# EAGLE board CNC_KONTROL_A4988 (EAGLE 7.5.0)
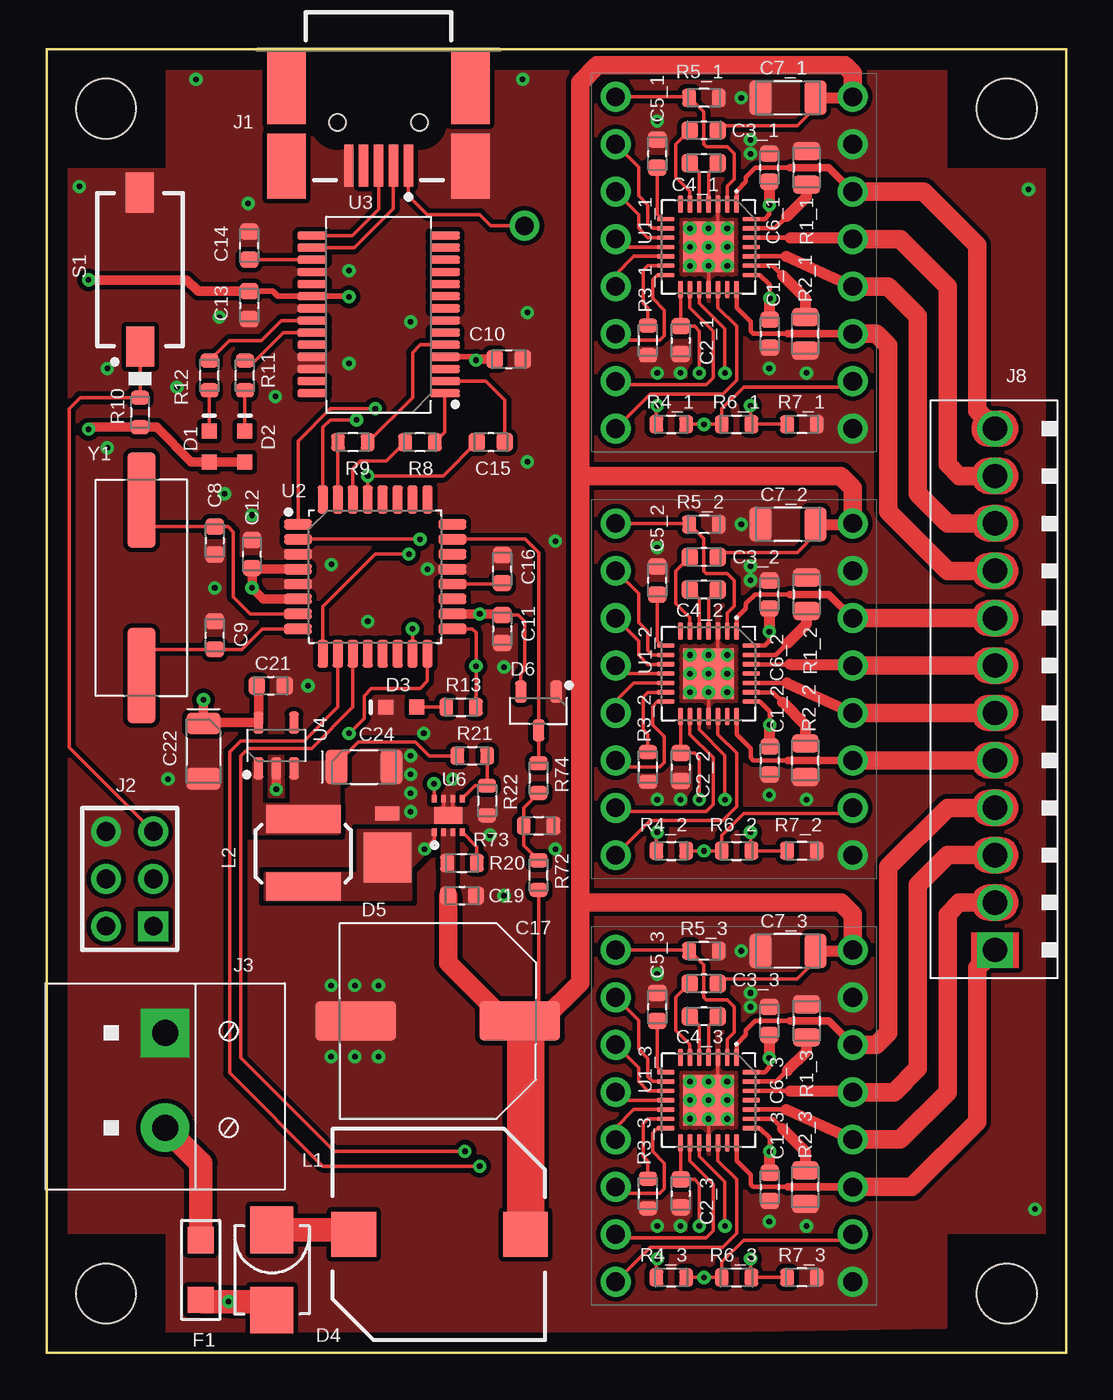
[diagram p0: board, top side]
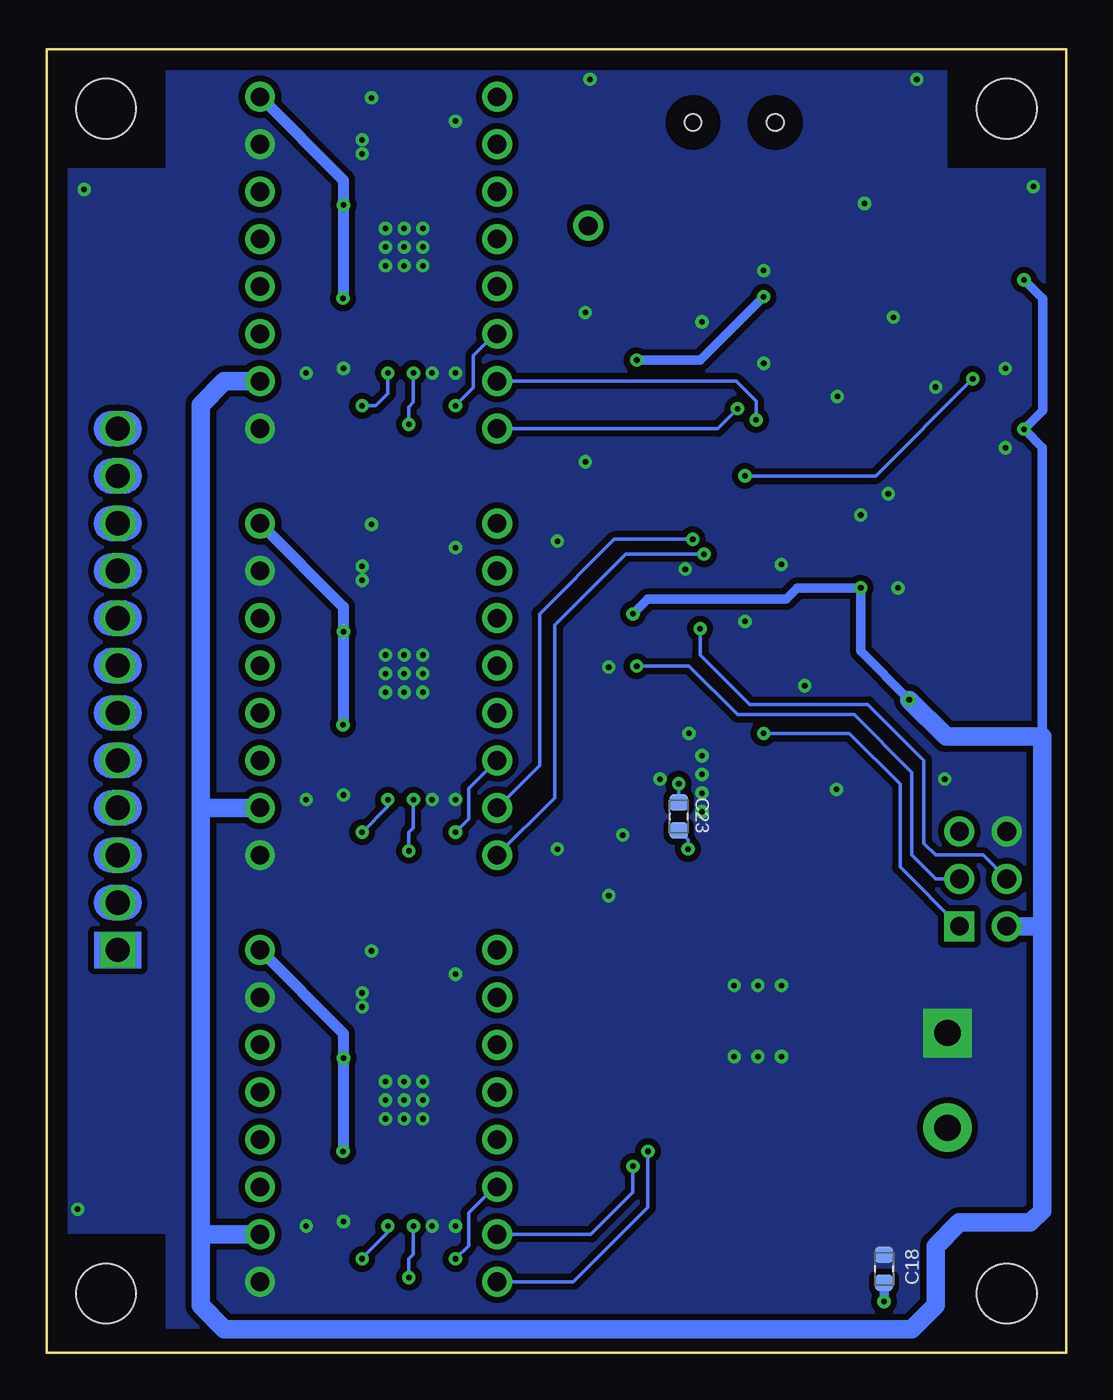
[diagram p1: board, bottom side, seen from below]

Size 54.61 x 69.85 mm. Coordinates in mm from the lower left corner, seen from the top.
Outline: 54.61,69.85 0,69.85 0,0 54.61,0 54.61,69.85
Copper layers (1*16): Top 0.035mm / dielectric 1.5mm / Bottom 0.035mm
Design rules "default *": minimum track width 10mil, minimum drill 0.61mm, track to track 8mil, track to pad 8mil, pad to pad 8mil, via to via 8mil, smd to smd 8mil, copper to edge 40mil, drill to drill 8mil, minimum pad ring 0mil, minimum via ring 8mil, stop-mask expansion 2mil, vias tented up to drill 12mil, thermal gap 10mil
Net classes: 0 Default: width 0.2 mm, clearance 0.2 mm
Holes 3.2 mm at 51.44,66.67 51.44,3.17 3.17,66.67 3.17,3.17

## Footprints (pad centres in the part's own frame; a part is rotated, then mirrored left to right if it is on the bottom)
CAP_1608_N = smd 0.87 x 0.97: 1 -0.75,0; 2 0.75,0
CAP_1608_N_C1_2 = smd 0.87 x 0.97: 1 -0.75,0; 2 0.75,0
CAP_1608_N_C11 = smd 0.87 x 0.97: 1 -0.75,0; 2 0.75,0
CAP_1608_N_C3_1 = smd 0.87 x 0.97: 1 -0.75,0; 2 0.75,0
CAP_1608_N_C4_1 = smd 0.87 x 0.97: 1 -0.75,0; 2 0.75,0
CAP_1608_N_C5_1 = smd 0.87 x 0.97: 1 -0.75,0; 2 0.75,0
CAP_1608_N_C6_2 = smd 0.87 x 0.97: 1 -0.75,0; 2 0.75,0
CAP_3216_N = smd 1.16 x 1.82: 1 -1.475,0; 2 1.475,0
CAP_1608_N_C9 = smd 0.87 x 0.97: 1 -0.75,0; 2 0.75,0
CAP_1608_N_C10 = smd 0.87 x 0.97: 1 -0.75,0; 2 0.75,0
CAP_1608_N_C12 = smd 0.87 x 0.97: 1 -0.75,0; 2 0.75,0
CAPAE1030X1050L350X90N = smd 4.31 x 2.12: 1 -4.4,0; 2 4.4,0
CAP_1608_N_C18 = smd 0.87 x 0.97: 1 -0.75,0; 2 0.75,0
CAP_1608_N_C19 = smd 0.87 x 0.97: 1 -0.75,0; 2 0.75,0
CAP_1608_N_C21 = smd 0.87 x 0.97: 1 -0.75,0; 2 0.75,0
CAPP_3216_N = smd 1.16 x 1.82: 1 -1.475,0; 2 1.475,0
CAPP_3216_N_C24 = smd 1.16 x 1.82: 1 -1.475,0; 2 1.475,0
KINGBRIGHT_APG1608CGKC_T = smd 0.8 x 0.8: 1 0.825,0; 2 -0.825,0
KINGBRIGHT_APG1608CGKC_T_D2 = smd 0.8 x 0.8: 1 0.825,0; 2 -0.825,0
SMB-DIODE-2K = smd 2.3 x 2.5: 1 0,2.15; 2 0,-2.15
MBRM130LT1G = smd 2.667 x 2.54: 1 -0.7,0 | smd 0.762 x 1.27: 2 1.652,0
SOT23-3P95_240X110L43X44N = smd 0.62 x 1.18: 1 -0.95,-1.035; 2 0.95,-1.035; 3 0,1.035
TP = drill 1 pad 1.6: 1 0,0
TP_DIR_2 = drill 1 pad 1.6: 1 0,0
TP_DIR_3 = drill 1 pad 1.6: 1 0,0
TP_EN_3 = drill 1 pad 1.6: 1 0,0
1206NW = smd 1.397 x 1.397: 1 0,1.6; 2 0,-1.6
TP_GND_1 = drill 1 pad 1.6: 1 0,0
MOLEX_0678038020 = smd 0.5 x 2.25: 1 -1.6,2.225; 2 -0.8,2.225; 3 0,2.225; 4 0.8,2.225; 5 1.6,2.225 | smd 2.05 x 3.5: 6 -4.925,2.25; 7 4.925,2.25 | smd 2.05 x 4: 8 -4.925,-2; 9 4.925,-2 | hole 0.9: -2.2,-0.1; 2.2,-0.1
ICSP = drill 1 pad 1.6 square: 1 -2.54,-1.27 | drill 1 pad 1.6: 2 -2.54,1.27; 3 0,-1.27; 4 0,1.27; 5 2.54,-1.27; 6 2.54,1.27
TE_TB-1X2_5.08_11X13_SC_A35 = drill 1.4 pad 2.6 square: 1 -2.54,0 | drill 1.4 pad 2.6: 2 2.54,0
OST_TB-1X12_2.54_31X7_SC_H = drill 1.3 pad 1.9 square: 1 -13.97,0 | drill 1.3 pad 1.9: 2 -11.43,0; 3 -8.89,0; 4 -6.35,0; 5 -3.81,0; 6 -1.27,0; 7 1.27,0; 8 3.81,0; 9 6.35,0; 10 8.89,0; 11 11.43,0; 12 13.97,0
SDR1105-220ML = smd 2.4 x 2.4: 1 0,4.5; 2 0,-4.7
SRN50408R2M = smd 1.5 x 4: 1 -1.8,0; 2 1.8,0
TP_MS1_3 = drill 1 pad 1.6: 1 0,0
TP_MS2_3 = drill 1 pad 1.6: 1 0,0
RES_2012_N = smd 0.98 x 1.42: 1 -0.895,0; 2 0.895,0
RES_1608_N_R3_1 = smd 0.75 x 0.97: 1 -0.795,0; 2 0.795,0
RES_1608_N = smd 0.75 x 0.97: 1 -0.795,0; 2 0.795,0
RES_1608_N_R5_1 = smd 0.75 x 0.97: 1 -0.795,0; 2 0.795,0
RES_1608_N_R10 = smd 0.75 x 0.97: 1 -0.795,0; 2 0.795,0
RES_1608_N_R12 = smd 0.75 x 0.97: 1 -0.795,0; 2 0.795,0
RES_1608_N_R20 = smd 0.75 x 0.97: 1 -0.795,0; 2 0.795,0
RES_1608_N_R21 = smd 0.75 x 0.97: 1 -0.795,0; 2 0.795,0
RES_1608_N_R22 = smd 0.75 x 0.97: 1 -0.795,0; 2 0.795,0
RES_1608_N_R72 = smd 0.75 x 0.97: 1 -0.795,0; 2 0.795,0
RES_1608_N_R73 = smd 0.75 x 0.97: 1 -0.795,0; 2 0.795,0
TP_RST_2 = drill 1 pad 1.6: 1 0,0
CK_BPA-01S = smd 2.15 x 1.5: 1 -4.13,0; 2 4.13,0
TP_SLEEP_1 = drill 1 pad 1.6: 1 0,0
TP_SLEEP_2 = drill 1 pad 1.6: 1 0,0
TP_SLEEP_3 = drill 1 pad 1.6: 1 0,0
TP_STEP_2 = drill 1 pad 1.6: 1 0,0
TP_STEP_3 = drill 1 pad 1.6: 1 0,0
QFN29P50_500X500X90L60X23T270N = smd 0.26 x 0.94: 1 -1.5,-2.29; 2 -1,-2.29; 3 -0.5,-2.29; 4 0,-2.29; 5 0.5,-2.29; 6 1,-2.29; 7 1.5,-2.29; 15 1.5,2.29; 16 1,2.29; 17 0.5,2.29; 18 0,2.29; 19 -0.5,2.29; 20 -1,2.29; 21 -1.5,2.29 | smd 0.94 x 0.26: 8 2.29,-1.5; 9 2.29,-1; 10 2.29,-0.5; 11 2.29,0; 12 2.29,0.5; 13 2.29,1; 14 2.29,1.5; 22 -2.29,1.5; 23 -2.29,1; 24 -2.29,0.5; 25 -2.29,0; 26 -2.29,-0.5; 27 -2.29,-1; 28 -2.29,-1.5 | smd 2.7 x 2.7: 29 0,0
QFN29P50_500X500X90L60X23T270N_U1_3 = smd 0.26 x 0.94: 1 -1.5,-2.29; 2 -1,-2.29; 3 -0.5,-2.29; 4 0,-2.29; 5 0.5,-2.29; 6 1,-2.29; 7 1.5,-2.29; 15 1.5,2.29; 16 1,2.29; 17 0.5,2.29; 18 0,2.29; 19 -0.5,2.29; 20 -1,2.29; 21 -1.5,2.29 | smd 0.94 x 0.26: 8 2.29,-1.5; 9 2.29,-1; 10 2.29,-0.5; 11 2.29,0; 12 2.29,0.5; 13 2.29,1; 14 2.29,1.5; 22 -2.29,1.5; 23 -2.29,1; 24 -2.29,0.5; 25 -2.29,0; 26 -2.29,-0.5; 27 -2.29,-1; 28 -2.29,-1.5 | smd 2.7 x 2.7: 29 0,0
QFP32P80_900X900X120L60X37N_AD2 = smd 0.57 x 1.5: 1 -2.8,-4.135; 2 -2,-4.135; 3 -1.2,-4.135; 4 -0.4,-4.135; 5 0.4,-4.135; 6 1.2,-4.135; 7 2,-4.135; 8 2.8,-4.135; 17 2.8,4.135; 18 2,4.135; 19 1.2,4.135; 20 0.4,4.135; 21 -0.4,4.135; 22 -1.2,4.135; 23 -2,4.135; 24 -2.8,4.135 | smd 1.5 x 0.57: 9 4.135,-2.8; 10 4.135,-2; 11 4.135,-1.2; 12 4.135,-0.4; 13 4.135,0.4; 14 4.135,1.2; 15 4.135,2; 16 4.135,2.8; 25 -4.135,2.8; 26 -4.135,2; 27 -4.135,1.2; 28 -4.135,0.4; 29 -4.135,-0.4; 30 -4.135,-1.2; 31 -4.135,-2; 32 -4.135,-2.8
SOP28P65_1020X780X200L75X30N_AD2 = smd 0.44 x 1.6: 1 -4.225,-3.555; 2 -3.575,-3.555; 3 -2.925,-3.555; 4 -2.275,-3.555; 5 -1.625,-3.555; 6 -0.975,-3.555; 7 -0.325,-3.555; 8 0.325,-3.555; 9 0.975,-3.555; 10 1.625,-3.555; 11 2.275,-3.555; 12 2.925,-3.555; 13 3.575,-3.555; 14 4.225,-3.555; 15 4.225,3.555; 16 3.575,3.555; 17 2.925,3.555; 18 2.275,3.555; 19 1.625,3.555; 20 0.975,3.555; 21 0.325,3.555; 22 -0.325,3.555; 23 -0.975,3.555; 24 -1.625,3.555; 25 -2.275,3.555; 26 -2.925,3.555; 27 -3.575,3.555; 28 -4.225,3.555
SOT23-5P95_275X110L40X32N = smd 0.52 x 1.17: 1 -0.95,-1.22; 2 0,-1.22; 3 0.95,-1.22; 4 0.95,1.22; 5 -0.95,1.22
AOZ1281 = smd 0.4 x 0.25: 1 -0.9,0.75; 2 -0.9,0.25; 3 -0.9,-0.25; 4 -0.9,-0.75; 5 0.9,-0.75; 6 0.9,-0.25; 7 0.9,0.25; 8 0.9,0.75 | smd 0.9 x 1.5: 9 0,0
TP_VUSB = drill 1 pad 1.6: 1 0,0
XTAL1140X490X430D1340L450X60N = smd 5.11 x 1.51: 1 -4.7,0; 2 4.7,0

## Placement (x,y rotation side)
C1_1  100n  [CAP_1608_N]  38.73,54.61 270 top
C1_2  100n  [CAP_1608_N_C1_2]  38.73,31.75 270 top
C1_3  100n  [CAP_1608_N_C1_2]  38.73,8.89 270 top
C2_1  0.22u  [CAP_1608_N_C11]  33.96,54.26 270 top
C2_2  0.22u  [CAP_1608_N_C11]  33.96,31.4 270 top
C2_3  0.22u  [CAP_1608_N_C11]  33.96,8.54 270 top
C3_1  100n  [CAP_1608_N_C3_1]  35.21,65.51 180 top
C3_2  100n  [CAP_1608_N_C3_1]  35.21,42.65 180 top
C3_3  100n  [CAP_1608_N_C3_1]  35.21,19.79 180 top
C4_1  100n  [CAP_1608_N_C4_1]  35.21,63.76 180 top
C4_2  100n  [CAP_1608_N_C11]  35.21,40.9 180 top
C4_3  100n  [CAP_1608_N_C11]  35.21,18.04 180 top
C5_1  0.22u  [CAP_1608_N_C5_1]  32.71,64.26 90 top
C5_2  0.22u  [CAP_1608_N_C5_1]  32.71,41.4 90 top
C5_3  0.22u  [CAP_1608_N_C5_1]  32.71,18.54 90 top
C6_1  100n  [CAP_1608_N_C3_1]  38.71,63.51 90 top
C6_2  100n  [CAP_1608_N_C6_2]  38.71,40.65 90 top
C6_3  100n  [CAP_1608_N_C6_2]  38.71,17.79 90 top
C7_1  4.7u  [CAP_3216_N]  39.71,67.26 180 top
C7_2  4.7u  [CAP_3216_N]  39.71,44.4 180 top
C7_3  4.7u  [CAP_3216_N]  39.71,21.54 180 top
C8  16p  [CAP_1608_N]  9.01,43.53 270 top
C9  16p  [CAP_1608_N_C9]  9.01,38.45 90 top
C10  100n  [CAP_1608_N_C10]  24.75,53.25 0 top
C11  100n  [CAP_1608_N_C11]  24.4,38.8 270 top
C12  100n  [CAP_1608_N_C12]  11,42.8 90 top
C13  100n  [CAP_1608_N_C9]  10.85,56.14 270 top
C14  100n  [CAP_1608_N_C11]  10.85,59.34 90 top
C15  100n  [CAP_1608_N_C11]  23.8,48.8 180 top
C16  100n  [CAP_1608_N_C9]  24.4,42 90 top
C17  220 uF 35V  [CAPAE1030X1050L350X90N]  20.95,17.78 180 top
C18  0.1uF  [CAP_1608_N_C18]  9.75,4.5 90 bottom
C19  0.1uF  [CAP_1608_N_C19]  22.25,24.5 0 top
C21  0.1uF  [CAP_1608_N_C21]  12,35.75 0 top
C22  22uF  [CAPP_3216_N]  8.4,32.25 270 top
C23  10nF  [CAP_1608_N_C18]  20.75,28.75 90 bottom
C24  22uF  [CAPP_3216_N_C24]  17,31.4 0 top
D1  APG1608CGKC/T  [KINGBRIGHT_APG1608CGKC_T]  8.72,48.57 270 top
D2  APG1608CGKC/T  [KINGBRIGHT_APG1608CGKC_T_D2]  10.62,48.57 270 top
D3  APG1608CGKC/T  [KINGBRIGHT_APG1608CGKC_T_D2]  19,34.6 0 top
D4  S3AB-13_SMB  [SMB-DIODE-2K]  12.06,4.45 0 top
D5  MBRM130LT1G  [MBRM130LT1G]  18.25,27.25 90 top
D6  BAT54ALT1G  [SOT23-3P95_240X110L43X44N]  26.35,34.4 180 top
DIR_1  DIR  [TP]  30.48,49.53 90 top
DIR_2  DIR  [TP_DIR_2]  30.48,26.67 90 top
DIR_3  DIR  [TP_DIR_3]  30.48,3.81 90 top
EN_1  EN  [TP]  30.48,67.31 90 top
EN_2  EN  [TP]  30.48,44.45 90 top
EN_3  EN  [TP_EN_3]  30.48,21.59 90 top
F1  C1S5  [1206NW]  8.26,4.45 0 top
GND_1  GND  [TP_GND_1]  43.18,64.77 90 top
GND_2  GND  [TP_GND_1]  43.18,41.91 90 top
GND_3  GND  [TP_GND_1]  43.18,19.05 90 top
J1  0678038020  [MOLEX_0678038020]  17.78,65.84 180 top
J2  ICSP  [ICSP]  4.45,25.4 90 top
J3  1546074-2  [TE_TB-1X2_5.08_11X13_SC_A35]  6.35,14.61 270 top
J8  OSTVN12A150  [OST_TB-1X12_2.54_31X7_SC_H]  50.8,35.56 90 top
L1  22uH  [SDR1105-220ML]  20.95,6.35 90 top
L2  8.2uH  [SRN50408R2M]  13.75,26.8 90 top
MS1_1  MS1  [TP]  30.48,64.77 90 top
MS1_2  MS1  [TP]  30.48,41.91 90 top
MS1_3  MS1  [TP_MS1_3]  30.48,19.05 90 top
MS2_1  MS2  [TP]  30.48,62.23 90 top
MS2_2  MS2  [TP]  30.48,39.37 90 top
MS2_3  MS2  [TP_MS2_3]  30.48,16.51 90 top
MS3_1  MS3  [TP]  30.48,59.69 90 top
MS3_2  MS3  [TP]  30.48,36.83 90 top
MS3_3  MS3  [TP]  30.48,13.97 90 top
OUT1A_1  1A  [TP_GND_1]  43.18,57.15 90 top
OUT1A_2  1A  [TP_GND_1]  43.18,34.29 90 top
OUT1A_3  1A  [TP_GND_1]  43.18,11.43 90 top
OUT1B_1  1B  [TP_GND_1]  43.18,54.61 90 top
OUT1B_2  1B  [TP_GND_1]  43.18,31.75 90 top
OUT1B_3  1B  [TP_GND_1]  43.18,8.89 90 top
OUT2A_1  2A  [TP_GND_1]  43.18,59.69 90 top
OUT2A_2  2A  [TP_GND_1]  43.18,36.83 90 top
OUT2A_3  2A  [TP_GND_1]  43.18,13.97 90 top
OUT2B_1  2B  [TP_GND_1]  43.18,62.23 90 top
OUT2B_2  2B  [TP_GND_1]  43.18,39.37 90 top
OUT2B_3  2B  [TP_GND_1]  43.18,16.51 90 top
R1_1  0.05  [RES_2012_N]  40.71,63.51 270 top
R1_2  0.05  [RES_2012_N]  40.71,40.65 270 top
R1_3  0.05  [RES_2012_N]  40.71,17.79 270 top
R2_1  0.05  [RES_2012_N]  40.64,54.61 90 top
R2_2  0.05  [RES_2012_N]  40.64,31.75 90 top
R2_3  0.05  [RES_2012_N]  40.64,8.89 90 top
R3_1  10K  [RES_1608_N_R3_1]  32.21,54.26 270 top
R3_2  10K  [RES_1608_N_R3_1]  32.21,31.4 270 top
R3_3  10K  [RES_1608_N_R3_1]  32.21,8.54 270 top
R4_1  100K  [RES_1608_N]  33.46,49.76 0 top
R4_2  100K  [RES_1608_N]  33.46,26.9 0 top
R4_3  100K  [RES_1608_N]  33.46,4.04 0 top
R5_1  100K  [RES_1608_N_R5_1]  35.21,67.26 180 top
R5_2  100K  [RES_1608_N_R10]  35.21,44.4 180 top
R5_3  100K  [RES_1608_N_R10]  35.21,21.54 180 top
R6_1  20K  [RES_1608_N]  36.96,49.76 0 top
R6_2  20K  [RES_1608_N]  36.96,26.9 0 top
R6_3  20K  [RES_1608_N]  36.96,4.04 0 top
R7_1  *  [RES_1608_N_R10]  40.46,49.76 180 top
R7_2  *  [RES_1608_N_R10]  40.46,26.9 180 top
R7_3  *  [RES_1608_N_R10]  40.46,4.04 180 top
R8  1K  [RES_1608_N]  20,48.8 180 top
R9  1K  [RES_1608_N]  16.4,48.8 180 top
R10  10K  [RES_1608_N_R10]  5,50.4 270 top
R11  1K  [RES_1608_N_R10]  10.62,52.38 90 top
R12  1K  [RES_1608_N_R12]  8.71,52.38 90 top
R13  1K  [RES_1608_N]  22.2,34.6 0 top
R20  10k  [RES_1608_N_R20]  22.25,26.25 0 top
R21  73.2k 1%  [RES_1608_N_R21]  22.8,32 0 top
R22  7.15k 1%  [RES_1608_N_R22]  23.6,29.6 270 top
R72  330k 1%  [RES_1608_N_R72]  26.35,25.6 90 top
R73  20.0k 1%  [RES_1608_N_R73]  26.35,28.25 0 top
R74  100  [RES_1608_N_R21]  26.35,30.8 270 top
RST_1  RST  [TP]  30.48,57.15 90 top
RST_2  RST  [TP_RST_2]  30.48,34.29 90 top
RST_3  RST  [TP]  30.48,11.43 90 top
S1  BPA01SB  [CK_BPA-01S]  5,58.05 90 top
SLEEP_1  SLEEP  [TP_SLEEP_1]  30.48,54.61 90 top
SLEEP_2  SLEEP  [TP_SLEEP_2]  30.48,31.75 90 top
SLEEP_3  SLEEP  [TP_SLEEP_3]  30.48,8.89 90 top
STEP_1  STEP  [TP]  30.48,52.07 90 top
STEP_2  STEP  [TP_STEP_2]  30.48,29.21 90 top
STEP_3  STEP  [TP_STEP_3]  30.48,6.35 90 top
TP_1  GND  [TP_GND_1]  43.18,49.53 90 top
TP_2  GND  [TP_GND_1]  43.18,26.67 90 top
TP_3  GND  [TP_GND_1]  43.18,3.81 90 top
U1_1  A4988  [QFN29P50_500X500X90L60X23T270N]  35.46,59.26 180 top
U1_2  A4988  [QFN29P50_500X500X90L60X23T270N]  35.46,36.4 180 top
U1_3  A4988  [QFN29P50_500X500X90L60X23T270N_U1_3]  35.46,13.54 180 top
U2  ATMEGA328P-AU  [QFP32P80_900X900X120L60X37N_AD2]  17.6,41.6 270 top
U3  FT232RL-TUBE  [SOP28P65_1020X780X200L75X30N_AD2]  17.78,55.65 90 top
U4  TPS76350DBV  [SOT23-5P95_275X110L40X32N]  12.3,32.55 0 top
U6  AOZ1281  [AOZ1281]  21.52,28.8 90 top
VDD_1  VDD  [TP_GND_1]  43.18,52.07 90 top
VDD_2  VDD  [TP_GND_1]  43.18,29.21 90 top
VDD_3  VDD  [TP_GND_1]  43.18,6.35 90 top
VMT_1  VMT  [TP_GND_1]  43.18,67.31 90 top
VMT_2  VMT  [TP_GND_1]  43.18,44.45 90 top
VMT_3  VMT  [TP_GND_1]  43.18,21.59 90 top
VUSB  TP  [TP_VUSB]  25.6,60.4 90 top
Y1  HC49/4HSMX  [XTAL1140X490X430D1340L450X60N]  5.08,40.99 90 top

## Library data of the parts
C1_1 = common; HIERARCHY: Block1 C1; UNIQUE_NAME: CAP_1608_METRIC
C1_2 = common; HIERARCHY: Block2 C1; UNIQUE_NAME: CAP_1608_METRIC
C1_3 = common; HIERARCHY: Block3 C1; UNIQUE_NAME: CAP_1608_METRIC
C2_1 = common; HIERARCHY: Block1 C2; UNIQUE_NAME: CAP_1608_METRIC
C2_2 = common; HIERARCHY: Block2 C2; UNIQUE_NAME: CAP_1608_METRIC
C2_3 = common; HIERARCHY: Block3 C2; UNIQUE_NAME: CAP_1608_METRIC
C3_1 = common; HIERARCHY: Block1 C3; UNIQUE_NAME: CAP_1608_METRIC
C3_2 = common; HIERARCHY: Block2 C3; UNIQUE_NAME: CAP_1608_METRIC
C3_3 = common; HIERARCHY: Block3 C3; UNIQUE_NAME: CAP_1608_METRIC
C4_1 = common; HIERARCHY: Block1 C4; UNIQUE_NAME: CAP_1608_METRIC
C4_2 = common; HIERARCHY: Block2 C4; UNIQUE_NAME: CAP_1608_METRIC
C4_3 = common; HIERARCHY: Block3 C4; UNIQUE_NAME: CAP_1608_METRIC
C5_1 = common; HIERARCHY: Block1 C5; UNIQUE_NAME: CAP_1608_METRIC
C5_2 = common; HIERARCHY: Block2 C5; UNIQUE_NAME: CAP_1608_METRIC
C5_3 = common; HIERARCHY: Block3 C5; UNIQUE_NAME: CAP_1608_METRIC
C6_1 = common; HIERARCHY: Block1 C6; UNIQUE_NAME: CAP_1608_METRIC
C6_2 = common; HIERARCHY: Block2 C6; UNIQUE_NAME: CAP_1608_METRIC
C6_3 = common; HIERARCHY: Block3 C6; UNIQUE_NAME: CAP_1608_METRIC
C7_1 = common; HIERARCHY: Block1 C7; UNIQUE_NAME: CAP_3216_METRIC
C7_2 = common; HIERARCHY: Block2 C7; UNIQUE_NAME: CAP_3216_METRIC
C7_3 = common; HIERARCHY: Block3 C7; UNIQUE_NAME: CAP_3216_METRIC
C8-C16 = common; UNIQUE_NAME: CAP_1608_METRIC
C17 = common; DATASHEET: http://datasheets.diptrace.com/cap/afc.pdf; MANUFACTURER: Cornell Dubilier Electronics; PART_NUMBER_(DIGI-KEY): AFC227M35G24B-F-ND; UNIQUE_NAME: CDE_AFC,SIZE_G_CAPP
C18 C19 C21-C24 DIR_1-DIR_3 EN_1-EN_3 F1 GND_1-GND_3 J2 L1 L2 MS1_1-MS1_3 MS2_1-MS2_3 MS3_1-MS3_3 OUT1A_1-OUT1A_3 OUT1B_1-OUT1B_3 OUT2A_1-OUT2A_3 OUT2B_1-OUT2B_3 R20-R22 R72-R74 RST_1-RST_3 SLEEP_1-SLEEP_3 STEP_1-STEP_3 TP_1-TP_3 U6 VDD_1-VDD_3 VMT_1-VMT_3 VUSB = common
D1-D3 = common; DATASHEET: http://datasheets.diptrace.com/sensors_led/APG1608CGKC-T.pdf; MANUFACTURER: Kingbright; PART_NUMBER_(DIGI-KEY): 754-1357-6-ND; UNIQUE_NAME: KINGBRIGHT_APG1608CGKC_T
D4 = common; DATASHEET: https://www.diodes.com/assets/Datasheets/ds16005.pdf; STYLE: SMD; TYPE: Schottky
D5 = common; DATASHEET: https://www.onsemi.com/pub/Collateral/MBRM130L-D.PDF; STYLE: SMD; TYPE: Schottky
D6 = common; MANUFACTURER: ON Semiconductor; STYLE: SMT; TYPE: Diode
J1 = common; DATASHEET: http://datasheets.diptrace.com/con_usb/678038020_sd.pdf; MANUFACTURER: Molex; PART_NUMBER_(DIGI-KEY): WM17148DKR-ND; UNIQUE_NAME: MOLEX_0678038020
J3 = common; DATASHEET: http://datasheets.diptrace.com/con_terminal_blocks/1546074.pdf; MANUFACTURER: TE Connectivity; PART_NUMBER_(DIGI-KEY): 1546074-2-ND; UNIQUE_NAME: TE_TB-1X2_5.08_11X13_SC_A35
J8 = common; DATASHEET: http://datasheets.diptrace.com/con_terminal_blocks/ostvnxxa150.pdf; MANUFACTURER: On Shore Technology; PART_NUMBER_(DIGI-KEY): ED10568-ND; UNIQUE_NAME: OST_TB-1X12_2.54_31X7_SC_H
R1_1 = common; HIERARCHY: Block1 R1; UNIQUE_NAME: RES_2012_METRIC
R1_2 = common; HIERARCHY: Block2 R1; UNIQUE_NAME: RES_2012_METRIC
R1_3 = common; HIERARCHY: Block3 R1; UNIQUE_NAME: RES_2012_METRIC
R2_1 = common; HIERARCHY: Block1 R2; UNIQUE_NAME: RES_2012_METRIC
R2_2 = common; HIERARCHY: Block2 R2; UNIQUE_NAME: RES_2012_METRIC
R2_3 = common; HIERARCHY: Block3 R2; UNIQUE_NAME: RES_2012_METRIC
R3_1 = common; HIERARCHY: Block1 R3; UNIQUE_NAME: RES_1608_METRIC
R3_2 = common; HIERARCHY: Block2 R3; UNIQUE_NAME: RES_1608_METRIC
R3_3 = common; HIERARCHY: Block3 R3; UNIQUE_NAME: RES_1608_METRIC
R4_1 = common; HIERARCHY: Block1 R4; UNIQUE_NAME: RES_1608_METRIC
R4_2 = common; HIERARCHY: Block2 R4; UNIQUE_NAME: RES_1608_METRIC
R4_3 = common; HIERARCHY: Block3 R4; UNIQUE_NAME: RES_1608_METRIC
R5_1 = common; HIERARCHY: Block1 R5; UNIQUE_NAME: RES_1608_METRIC
R5_2 = common; HIERARCHY: Block2 R5; UNIQUE_NAME: RES_1608_METRIC
R5_3 = common; HIERARCHY: Block3 R5; UNIQUE_NAME: RES_1608_METRIC
R6_1 = common; HIERARCHY: Block1 R6; UNIQUE_NAME: RES_1608_METRIC
R6_2 = common; HIERARCHY: Block2 R6; UNIQUE_NAME: RES_1608_METRIC
R6_3 = common; HIERARCHY: Block3 R6; UNIQUE_NAME: RES_1608_METRIC
R7_1 = common; HIERARCHY: Block1 R7; UNIQUE_NAME: RES_1608_METRIC
R7_2 = common; HIERARCHY: Block2 R7; UNIQUE_NAME: RES_1608_METRIC
R7_3 = common; HIERARCHY: Block3 R7; UNIQUE_NAME: RES_1608_METRIC
R8-R13 = common; UNIQUE_NAME: RES_1608_METRIC
S1 = common; DATASHEET: http://datasheets.diptrace.com/switches/BPA_series.pdf; MANUFACTURER: C&K; PART_NUMBER_(DIGI-KEY): BPA01SB-ND; UNIQUE_NAME: CK_BPA-01S
U1_1 = common; HIERARCHY: Block1 U1; MANUFACTURER: Silicon Labs
U1_2 = common; HIERARCHY: Block2 U1; MANUFACTURER: Silicon Labs
U1_3 = common; HIERARCHY: Block3 U1; MANUFACTURER: Silicon Labs
U2 = common; DATASHEET: http://datasheets.diptrace.com/microchip/atmel-8271-8-bit-avr-microcontroller-atmega48a-48pa-88a-88pa-168a-168pa-328-328p_datasheet_summary.pdf; MANUFACTURER: Atmel; PART_NUMBER_(DIGI-KEY): ATMEGA328P-AU-ND; UNIQUE_NAME: ATMEL_32A
U3 = common; DATASHEET: http://datasheets.diptrace.com/misc/FT232R.pdf; MANUFACTURER: FTDI Chip; PART_NUMBER_(DIGI-KEY): 768-1306-ND; UNIQUE_NAME: FTDI_SSOP-28
U4 = common; MANUFACTURER: NXP Semiconductors
Y1 = common; DATASHEET: http://datasheets.diptrace.com/crystals/hc49-4hsmx.pdf; MANUFACTURER: CN Electronics; UNIQUE_NAME: IQD_HC49_4H

## Nets
9V: C24.1 L2.2 R21.1 U4.1 U4.3
GND: C1_1.2 C1_2.2 C1_3.2 C2_1.2 C2_2.2 C2_3.2 C5_1.2 C5_2.2 C5_3.2 C6_1.2 C6_2.2 C6_3.2 C7_1.2 C7_2.2 C7_3.2 C8.2 C9.2 C10.2 C11.2 C12.2 C13.2 C14.2 C16.2 C17.2 C18.2 C19.2 C21.2 C22.2 C24.2 D3.2 D5.2 D6.1 GND_1.1 GND_2.1 GND_3.1 J1.5 J1.6 J2.6 J3.1 R1_1.1 R1_2.1 R1_3.1 R2_1.1 R2_2.1 R2_3.1 R3_1.2 R3_2.2 R3_3.2 R5_1.1 R5_2.1 R5_3.1 R7_1.1 R7_2.1 R7_3.1 R22.2 R73.2 S1.2 TP_1.1 TP_2.1 TP_3.1 U1_1.3 U1_1.18 U1_1.29 U1_2.3 U1_2.18 U1_2.29 U1_3.3 U1_3.18 U1_3.29 U2.3 U2.5 U2.21 U3.7 U3.18 U3.21 U3.25 U3.26 U4.2 U6.6 U6.7 U6.9
Net_0_1: R1_1.2 U1_1.27
Net_0_2: R1_2.2 U1_2.27
Net_0_3: R1_3.2 U1_3.27
Net_1: D3.1 R13.1
Net_2_1: R2_1.2 U1_1.23
Net_2_2: R2_2.2 U1_2.23
Net_2_3: R2_3.2 U1_3.23
Net_7: D6.3 R74.1 U2.23
Net_8: C2_1.1 C2_2.1 C2_3.1 C10.1 C11.1 C12.1 C13.1 C21.1 C22.1 D1.1 D2.1 D6.2 J2.2 R4_1.2 R4_2.2 R4_3.2 R6_1.1 R6_2.1 R6_3.1 R10.2 U1_1.15 U1_2.15 U1_3.15 U2.4 U2.6 U2.18 U3.4 U3.20 U4.5 VDD_1.1 VDD_2.1 VDD_3.1
Net_11_1: C3_1.2 U1_1.6
Net_11_2: C3_2.2 U1_2.6
Net_11_3: C3_3.2 U1_3.6
Net_12_1: C4_1.1 U1_1.4
Net_12_2: C4_2.1 U1_2.4
Net_12_3: C4_3.1 U1_3.4
Net_13_1: C4_1.2 U1_1.5
Net_13_2: C4_2.2 U1_2.5
Net_13_3: C4_3.2 U1_3.5
Net_14_1: C5_1.1 U1_1.8
Net_14_2: C5_2.1 U1_2.8
Net_14_3: C5_3.1 U1_3.8
Net_15_1: R3_1.1 U1_1.13
Net_15_2: R3_2.1 U1_2.13
Net_15_3: R3_3.1 U1_3.13
Net_16_1: R4_1.1 SLEEP_1.1 U1_1.14
Net_16_2: R4_2.1 SLEEP_2.1 U1_2.14
Net_16_3: R4_3.1 SLEEP_3.1 U1_3.14
Net_17_1: MS1_1.1 U1_1.9
Net_17_2: MS1_2.1 U1_2.9
Net_17_3: MS1_3.1 U1_3.9
Net_18_1: MS2_1.1 U1_1.10
Net_18_2: MS2_2.1 U1_2.10
Net_18_3: MS2_3.1 U1_3.10
Net_19_1: MS3_1.1 U1_1.11
Net_19_2: MS3_2.1 U1_2.11
Net_19_3: MS3_3.1 U1_3.11
Net_20_1: EN_1.1 R5_1.2 U1_1.2
Net_20_2: EN_2.1 R5_2.2 U1_2.2
Net_20_3: EN_3.1 R5_3.2 U1_3.2
Net_21_1: RST_1.1 U1_1.12
Net_21_2: RST_2.1 U1_2.12
Net_21_3: RST_3.1 U1_3.12
Net_22_1: R6_1.2 R7_1.2 U1_1.17
Net_22_2: R6_2.2 R7_2.2 U1_2.17
Net_22_3: R6_3.2 R7_3.2 U1_3.17
Net_23: J1.3 U3.15
Net_24: J1.2 U3.16
Net_25: R8.1 U3.1
Net_26: R9.1 U3.5
Net_27: R8.2 U2.30
Net_28: R9.2 U2.31
Net_29: C9.1 U2.8 Y1.1
Net_30: C8.1 U2.7 Y1.2
Net_31: J2.4 U2.15
Net_32: J2.1 U2.16
Net_33: J2.3 R13.2 U2.17
Net_34: C15.2 J2.5 R10.1 S1.1 U2.29
Net_35: J1.1 VUSB.1
Net_36: C14.1 U3.17
Net_37: C15.1 U3.2
Net_38: C16.1 U2.20
Net_39: J8.10 OUT1A_1.1 U1_1.24
Net_40: J8.9 OUT1B_1.1 U1_1.21
Net_41: J8.11 OUT2A_1.1 U1_1.26
Net_42: J8.12 OUT2B_1.1 U1_1.1
Net_43: J8.6 OUT1A_2.1 U1_2.24
Net_44: J8.5 OUT1B_2.1 U1_2.21
Net_45: J8.7 OUT2A_2.1 U1_2.26
Net_46: J8.8 OUT2B_2.1 U1_2.1
Net_47: J8.2 OUT1A_3.1 U1_3.24
Net_48: J8.1 OUT1B_3.1 U1_3.21
Net_49: J8.3 OUT2A_3.1 U1_3.26
Net_50: J8.4 OUT2B_3.1 U1_3.1
Net_51: STEP_1.1 U1_1.16 U2.32
Net_52: DIR_1.1 U1_1.19 U2.1
Net_53: STEP_2.1 U1_2.16 U2.2
Net_54: DIR_2.1 U1_2.19 U2.9
Net_55: STEP_3.1 U1_3.16 U2.10
Net_56: DIR_3.1 U1_3.19 U2.11
Net_57: R11.2 U3.23
Net_58: R12.2 U3.22
Net_59: D1.2 R12.1
Net_60: D2.2 R11.1
Net_62: C18.1 D4.2 F1.2
Net_63: D4.1 L1.1
Net_94: F1.1 J3.2
Net_97: R72.2 R73.1 R74.2
Net_99: R20.2 U6.4
Net_100: C23.1 D5.1 L2.1 U6.1
Net_101: C23.2 U6.8
Net_103: R21.2 R22.1 U6.5
VMOT: C1_1.1 C1_2.1 C1_3.1 C3_1.1 C3_2.1 C3_3.1 C6_1.1 C6_2.1 C6_3.1 C7_1.1 C7_2.1 C7_3.1 C17.1 C19.1 L1.2 R20.1 R72.1 U1_1.22 U1_1.28 U1_2.22 U1_2.28 U1_3.22 U1_3.28 U6.2 U6.3 VMT_1.1 VMT_2.1 VMT_3.1

## Tracks (layer width: path | path; a pad name or v marks a point on that pad's centre or on a via)
9V
  Top 0.2: R21.1 20.5,32 19.75,32.75 16.7,32.75 15.35,31.4 C24.1
  pour Top (isolate 0.2, no thermals): 15.62,27.88 11.12,27.88 11.12,31.62 11.47,31.62 11.47,29.38 13.12,29.38 13.12,31.62 15.62,31.62
GND  (via drill 0.3 pad 0.6)
  Top 0.2: U1_1.18 v35.46,58.26 | U1_1.3 35.96,59.76 U1_1.29 | U1_2.18 v35.46,35.4 | U1_2.3 35.96,36.9 U1_2.29 | U1_3.18 v35.46,12.54 | U1_3.3 35.96,14.04 U1_3.29 | U6.6 21.77,29.05 U6.9 21.27,29.05 U6.7
  Top 0.5: U4.2 v12.3,30.2
  other vias: 36.46,60.26 35.46,60.26 34.46,60.26 34.46,59.26 35.46,59.26 36.46,59.26 36.46,58.26 34.46,58.26 37.21,67.26 32.71,66.01 37.71,65.01 40.71,52.51 38.71,52.76 33.96,52.51 32.71,52.51 37.71,64.26 36.46,37.4 35.46,37.4 34.46,37.4 34.46,36.4 35.46,36.4 36.46,36.4 36.46,35.4 34.46,35.4 37.21,44.4 32.71,43.15 37.71,42.15 40.71,29.65 38.71,29.9 33.96,29.65 32.71,29.65 37.71,41.4 36.46,14.54 35.46,14.54 34.46,14.54 34.46,13.54 35.46,13.54 36.46,13.54 36.46,12.54 34.46,12.54 37.21,21.54 32.71,20.29 37.71,19.29 40.71,6.79 38.71,7.04 33.96,6.79 32.71,6.79 37.71,18.54 9.01,40.99 17.78,15.88 16.51,15.88 15.24,15.88 15.24,19.68 16.51,19.68 17.78,19.68 20.2,33.2 19.5,55.25 16.2,58 3.25,52.75 1.75,62.5 10.79,61.59 16.19,53.02 12.25,51.25 6.99,51.75 9.53,46.04 3.25,48.5 11,44.9 20.4,42 19.5,31 19.5,30 19.5,29 19.5,32 21.75,30.75 27.25,43.5 6.5,30.75 14,35.75 15.25,42.25 27.25,27 24.5,36.75 25.75,47.75 25.75,55.75 8,68.25 23.75,27.75 25.5,68.25 9.25,55.5 24.5,24.5 17.2,39.2 52.6,62.35 52.95,7.7
  pour Bottom (isolate 0.33, rank 2): 6.48,69.09 6.48,63.37 0.76,63.37 0.76,6.48 6.48,6.48 6.48,0.76 48.13,1.4 48.13,6.48 53.85,6.48 53.85,63.37 48.13,63.37 48.13,69.09
  pour Top (isolate 0.25, rank 2): 6.48,69.09 6.48,63.37 0.76,63.37 0.76,6.48 6.48,6.48 6.48,0.76 48.13,1.4 48.13,6.48 53.85,6.48 53.85,63.37 48.13,63.37 48.13,69.09
Net_0_1
  Top 0.25: U1_1.27 39.01,60.26 39.65,60.9
  Top 0.6: 39.65,60.9 40.71,61.96 R1_1.2
Net_0_2
  Top 0.25: U1_2.27 39.05,37.4 39.66,38.02
  Top 0.6: 39.66,38.02 40.71,39.06 R1_2.2
Net_0_3
  Top 0.25: U1_3.27 39.09,14.54 39.69,15.13
  Top 0.6: 39.69,15.13 40.71,16.16 R1_3.2
Net_1
  Top 0.2: D3.1 R13.1 | R13.1
Net_2_1
  Top 0.25: U1_1.23 38.9,58.26 39.42,57.73
  Top 0.6: 39.42,57.73 40.64,56.52 R2_1.2
Net_2_2
  Top 0.25: U1_2.23 38.9,35.4 39.42,34.88
  Top 0.6: 39.42,34.88 40.64,33.66 R2_2.2
Net_2_3
  Top 0.25: U1_3.23 38.9,12.54 39.42,12.02
  Top 0.6: 39.42,12.02 40.64,10.79 R2_3.2
Net_7
  Top 0.2: U2.23 25.65,43.6 26.35,42.9 D6.3 R74.1 | R74.1
Net_8  (via drill 0.3 pad 0.6)
  Top 0.2: U1_1.15 C2_1.1 34.71,55.01 34.96,54.76 v34.96,52.51 | R4_1.2 v35.21,49.76 | v35.21,49.76 | v35.21,49.76 R6_1.1 36.16,50.59 37.34,51.76 42.87,51.76 VDD_1.1 | v35.21,49.76 | U1_2.15 C2_2.1 34.71,32.15 34.96,31.9 v34.96,29.65 | R4_2.2 v35.21,26.9 | v35.21,26.9 | v35.21,26.9 R6_2.1 36.16,27.73 37.34,28.9 42.87,28.9 VDD_2.1 | v35.21,26.9 | U1_3.15 C2_3.1 34.71,9.29 34.96,9.04 v34.96,6.79 | R4_3.2 v35.21,4.04 | v35.21,4.04 | v35.21,4.04 R6_3.1 36.16,4.87 37.34,6.04 42.87,6.04 VDD_3.1 | v35.21,4.04 | D6.2 25.4,36.4 25.6,36.6 25.6,39.2 25.25,39.55 C11.1
  Top 0.3: C13.1 12.11,56.89 12.38,56.62 U3.20 16.18,56.62 v16.2,56.6 | U3.4 22.82,53.38 v23,53.2
  Top 0.5: v2.25,49.5 2.35,49.6 R10.2 5.89,49.6 7.75,47.74 D1.1 D2.1 | D2.1 | v2.25,57.5 7.5,57.5 8.11,56.89 C13.1 | C21.1 11.35,35.65 U4.5 8.45,33.77 C22.1 v8.4,35 | v8.4,35 | U2.18 v23.2,39.6 | v23.2,39.6 | v23.2,39.6 24.35,39.6 C11.1 | U2.4 11.05,42 C12.1 v11,41 11.6,40.4 U2.6 | C10.1 23.05,53.25 v23,53.2
  Bottom 0.2: v35.21,49.76 35.21,50.69 34.96,50.94 v34.96,52.51 | v35.21,26.9 35.21,27.89 34.96,28.14 v34.96,29.65 | v35.21,4.04 35.21,5.04 34.96,5.29 v34.96,6.79
  Bottom 0.5: v8.4,35 11,37.6 v11,41 14.4,41 15,40.4 22.4,40.4 v23.2,39.6 | 1.27,33.02 1.27,48.52 v2.25,49.5 1.25,50.5 1.25,56.5 v2.25,57.5 | v23,53.2 19.6,53.2 v16.2,56.6
  Bottom 1: VDD_1.1 45.09,52.07 46.35,50.8 46.35,29.21 | 46.35,29.21 46.35,6.35 | 46.35,6.35 46.35,2.54 45.09,1.27 8.26,1.27 6.99,2.54 6.99,5.71 5.71,6.99 1.91,6.99 1.27,7.62 1.27,22.86 | 1.27,22.86 J2.2 1.27,22.86 | VDD_2.1 46.35,29.21 | VDD_3.1 46.35,6.35 | 1.27,22.86 1.27,33.02 6.42,33.02 v8.4,35
Net_11_1
  Top 0.2: C3_1.2 33.71,64.76 33.71,63.01 34.46,62.26 U1_1.6
Net_11_2
  Top 0.2: C3_2.2 33.71,41.9 33.71,40.15 34.46,39.4 U1_2.6
Net_11_3
  Top 0.2: C3_3.2 33.71,19.04 33.71,17.29 34.46,16.54 U1_3.6
Net_12_1
  Top 0.2: U1_1.4 35.46,63.26 C4_1.1
Net_12_2
  Top 0.2: U1_2.4 35.46,40.4 C4_2.1
Net_12_3
  Top 0.2: U1_3.4 35.46,17.54 C4_3.1
Net_13_1
  Top 0.2: U1_1.5 34.96,63.26 C4_1.2
Net_13_2
  Top 0.2: U1_2.5 34.96,40.4 C4_2.2
Net_13_3
  Top 0.2: U1_3.5 34.96,17.54 C4_3.2
Net_14_1
  Top 0.2: U1_1.8 32.96,60.76 32.71,61.01 C5_1.1
Net_14_2
  Top 0.2: U1_2.8 32.96,37.9 32.71,38.15 C5_2.1
Net_14_3
  Top 0.2: U1_3.8 32.96,15.04 32.71,15.29 C5_3.1
Net_15_1
  Top 0.2: U1_1.13 32.21,58.26 31.96,58.01 31.96,56.26 32.21,56.01 R3_1.1
Net_15_2
  Top 0.2: U1_2.13 32.21,35.4 31.96,35.15 31.96,33.4 32.21,33.15 R3_2.1
Net_15_3
  Top 0.2: U1_3.13 32.21,12.54 31.96,12.29 31.96,10.54 32.21,10.29 R3_3.1
Net_16_1  (via drill 0.3 pad 0.6)
  Top 0.2: U1_1.14 32.71,57.76 32.46,57.51 32.46,56.51 33.09,55.88 33.09,54.51 32.84,54.26 30.83,54.26 SLEEP_1.1 | v32.71,50.76 32.66,50.72 R4_1.1
  Bottom 0.2: SLEEP_1.1 30.59,54.5 30.7,54.5 31.75,53.45 31.75,51.72 v32.71,50.76
Net_16_2  (via drill 0.3 pad 0.6)
  Top 0.2: U1_2.14 32.71,34.9 32.46,34.65 32.46,33.65 33.09,33.02 33.09,31.65 32.84,31.4 30.83,31.4 SLEEP_2.1 | v32.71,27.9 32.66,27.86 R4_2.1
  Bottom 0.2: SLEEP_2.1 30.5,31.75 32,30.25 32,28.61 v32.71,27.9
Net_16_3  (via drill 0.3 pad 0.6)
  Top 0.2: U1_3.14 32.71,12.04 32.46,11.79 32.46,10.79 33.09,10.16 33.09,8.79 32.84,8.54 30.83,8.54 SLEEP_3.1 | v32.71,5.04 32.66,5 R4_3.1
  Bottom 0.2: SLEEP_3.1 30.61,8.89 32,7.5 32,5.75 v32.71,5.04
Net_17_1
  Top 0.2: MS1_1.1 31.71,63.54 31.71,62.01 32.21,61.51 32.21,60.51 32.46,60.26 U1_1.9
Net_17_2
  Top 0.2: MS1_2.1 31.71,40.68 31.71,39.15 32.21,38.65 32.21,37.65 32.46,37.4 U1_2.9
Net_17_3
  Top 0.2: MS1_3.1 31.71,17.82 31.71,16.29 32.21,15.79 32.21,14.79 32.46,14.54 U1_3.9
Net_18_1
  Top 0.2: U1_1.10 32.21,59.76 31.71,60.26 31.71,61 MS2_1.1
Net_18_2
  Top 0.2: U1_2.10 32.21,36.9 31.71,37.4 31.71,38.14 MS2_2.1
Net_18_3
  Top 0.2: U1_3.10 32.21,14.04 31.71,14.54 31.71,15.28 MS2_3.1
Net_19_1
  Top 0.2: U1_1.11 30.91,59.26 MS3_1.1
Net_19_2
  Top 0.2: U1_2.11 30.91,36.4 MS3_2.1
Net_19_3
  Top 0.2: U1_3.11 30.91,13.54 MS3_3.1
Net_20_1
  Top 0.2: EN_1.1 34.37,67.31 R5_1.2 34.46,67.26 35.21,66.51 35.21,64.76 35.34,64.64 36.46,64.64 36.84,64.26 36.84,62.88 36.46,62.51 U1_1.2
Net_20_2
  Top 0.2: EN_2.1 34.37,44.45 R5_2.2 34.46,44.4 35.21,43.65 35.21,41.9 35.34,41.77 36.46,41.77 36.84,41.4 36.84,40.02 36.46,39.65 U1_2.2
Net_20_3
  Top 0.2: EN_3.1 34.37,21.59 R5_3.2 34.46,21.54 35.21,20.79 35.21,19.04 35.34,18.91 36.46,18.91 36.84,18.54 36.84,17.16 36.46,16.79 U1_3.2
Net_21_1
  Top 0.2: U1_1.12 31.46,58.76 30.48,57.78 RST_1.1
Net_21_2
  Top 0.2: U1_2.12 31.46,35.9 30.48,34.92 RST_2.1
Net_21_3
  Top 0.2: U1_3.12 31.46,13.04 30.48,12.06 RST_3.1
Net_22_1  (via drill 0.3 pad 0.6)
  Top 0.2: v37.71,50.76 37.71,49.76 R6_1.2 R7_1.2 | R7_1.2 | U1_1.17 34.96,56.26 36.34,54.88 v36.34,52.51
  Bottom 0.2: v36.34,52.51 36.34,51.41 36.99,50.76 v37.71,50.76
Net_22_2  (via drill 0.3 pad 0.6)
  Top 0.2: v37.71,27.9 37.71,26.9 R6_2.2 R7_2.2 | R7_2.2 | U1_2.17 34.96,33.4 36.34,32.02 v36.34,29.65
  Bottom 0.2: v36.34,29.65 36.34,29.27 v37.71,27.9
Net_22_3  (via drill 0.3 pad 0.6)
  Top 0.2: v37.71,5.04 37.71,4.04 R6_3.2 R7_3.2 | R7_3.2 | U1_3.17 34.96,10.54 36.34,9.16 v36.34,6.79
  Bottom 0.2: v36.34,6.79 36.34,6.46 37.76,5.04 v37.71,5.04
Net_23
  Top 0.2: U3.15 16.38,59.88 17.78,61.28 J1.3
Net_24
  Top 0.2: U3.16 16.48,59.23 18.58,61.33 J1.2
Net_25
  Top 0.2: U3.1 21.34,49.34 R8.1
Net_26
  Top 0.2: U3.5 20.02,54.02 19.6,53.6 19.6,51.2 R9.1
Net_27
  Top 0.2: U2.30 16.4,47.4 16.8,47.8 18.2,47.8 R8.2
Net_28
  Top 0.2: U2.31 R9.2
Net_29
  Top 0.2: U2.8 11.55,38.8 10.46,37.7 C9.1 5.08,37.7 Y1.1
Net_30
  Top 0.2: U2.7 10.9,39.6 10,40.5 10,44 9.71,44.28 C8.1 5.08,44.28 Y1.2
Net_31  (via drill 0.3 pad 0.6)
  Top 0.2: U2.15 v19.6,38.8
  Bottom 0.2: v19.6,38.8 19.6,37.4 16.95,34.75 10.62,34.75 7.62,31.75 7.62,27.3 6.99,26.67 4.45,26.67 J2.4
Net_32  (via drill 0.3 pad 0.6)
  Top 0.2: U2.16 20.4,36 20,35.6 17.4,35.6 17,35.2 17,34 v16.2,33.2
  Bottom 0.2: v16.2,33.2 11.61,33.2 8.89,30.48 8.89,26.04 J2.1
Net_33  (via drill 0.3 pad 0.6)
  Top 0.2: R13.2 23,35.2 v23,36.8 23,38.6 22.8,38.8 U2.17
  Bottom 0.2: v23,36.8 20.2,36.8 17.6,34.2 11.34,34.2 8.26,31.11 8.26,26.67 6.99,25.4 J2.3
Net_34  (via drill 0.3 pad 0.6)
  Top 0.2: U2.29 v17.2,47 21.25,47 C15.2 | S1.1 v5,52.2 | v5,52.2 | v5,52.2 R10.1 1.79,51.2 1.2,50.6 1.2,32.45 J2.5
  Bottom 0.2: v17.2,47 10.2,47 v5,52.2
Net_35
  Top 0.2: J1.1 19.38,62.02 20.4,61 23.2,61 23.8,60.4 VUSB.1
Net_36
  Top 0.2: U3.17 10.87,58.58 C14.1
Net_37
  Top 0.2: U3.2 23.52,52.08 24.55,51.05 C15.1
Net_38
  Top 0.2: U2.20 24.35,41.2 C16.1
Net_39
  Top 0.25: U1_1.24 39.62,58.76
  Top 0.6: 39.62,58.76 OUT1A_1.1
  Top 1: J8.10 48.26,44.45 46.67,46.04 46.67,55.56 45.09,57.15 OUT1A_1.1
Net_40
  Top 0.25: 39.69,54.61 37.86,54.61 37.71,54.76 37.71,55.26 36.96,56.01 U1_1.21
  Top 0.4: OUT1B_1.1 39.69,54.61
  Top 1: J8.9 48.26,41.91 45.09,45.09 45.09,53.98 44.45,54.61 OUT1B_1.1
Net_41
  Top 0.25: U1_1.26 39.83,59.76 | 43.11,59.76 OUT2A_1.1
  Top 0.6: 39.83,59.76 43.11,59.76
  Top 1: J8.11 48.9,46.99 48.26,47.62 48.26,57.15 45.72,59.69 OUT2A_1.1
Net_42
  Top 0.25: 39.81,63.51 37.96,63.51 37.46,63.01 37.46,62.76 36.96,62.26 U1_1.1
  Top 0.4: OUT2B_1.1 41.9,63.51 39.81,63.51
  Top 1: J8.12 49.85,50.48 49.85,59.37 46.99,62.23 OUT2B_1.1
Net_43
  Top 0.25: U1_2.24 39.65,35.9
  Top 0.6: 39.65,35.9 OUT1A_2.1
  Top 1: OUT1A_2.1 J8.6 | J8.6
Net_44
  Top 0.25: 39.69,31.75 37.86,31.75 37.71,31.9 37.71,32.4 36.96,33.15 U1_2.21
  Top 0.4: OUT1B_2.1 39.69,31.75
  Top 1: OUT1B_2.1 J8.5 | J8.5
Net_45
  Top 0.25: U1_2.26 39.83,36.9 | 43.11,36.9 OUT2A_2.1
  Top 0.6: 39.83,36.9 43.11,36.9
  Top 1: J8.7 46.99,36.83 | 46.99,36.83 | 46.99,36.83 OUT2A_2.1
Net_46
  Top 0.25: 39.81,40.65 37.96,40.65 37.46,40.15 37.46,39.9 36.96,39.4 U1_2.1
  Top 0.4: OUT2B_2.1 41.9,40.65 39.81,40.65
  Top 1: J8.8 45.72,39.37 | 45.72,39.37 | 45.72,39.37 OUT2B_2.1
Net_47
  Top 0.25: U1_3.24 39.61,13.04
  Top 0.6: 39.61,13.04 OUT1A_3.1
  Top 1: OUT1A_3.1 45.72,11.43 48.26,13.97 48.26,23.5 48.9,24.13 J8.2
Net_48
  Top 0.25: 39.69,8.89 37.86,8.89 37.71,9.04 37.71,9.54 36.96,10.29 U1_3.21
  Top 0.4: OUT1B_3.1 39.69,8.89
  Top 1: OUT1B_3.1 46.35,8.89 49.85,12.38 49.85,20.64 J8.1
Net_49
  Top 0.25: U1_3.26 39.83,14.04 | 43.11,14.04 OUT2A_3.1
  Top 0.6: 39.83,14.04 43.11,14.04
  Top 1: J8.3 48.26,26.67 46.67,25.08 46.67,15.24 45.4,13.97 OUT2A_3.1
Net_50
  Top 0.25: 39.81,17.79 37.96,17.79 37.46,17.29 37.46,17.04 36.96,16.54 U1_3.1
  Top 0.4: OUT2B_3.1 41.9,17.79 39.81,17.79
  Top 1: J8.4 48.26,29.21 45.09,26.04 45.09,17.14 44.45,16.51 OUT2B_3.1
Net_51  (via drill 0.3 pad 0.6)
  Top 0.2: STEP_1.1 30.66,51.88 35.34,51.88 35.71,52.26 35.71,54.76 34.46,56.01 U1_1.16 | U2.32 14.8,49.6 15.2,50 v16.6,50
  Bottom 0.2: v16.6,50 16.6,51 17.67,52.07 STEP_1.1
Net_52  (via drill 0.3 pad 0.6)
  Top 0.2: DIR_1.1 32.34,51.38 36.21,51.38 36.96,52.13 36.96,55.01 35.96,56.01 U1_1.19 | U2.1 13.46,48.87 15.2,50.6 v17.6,50.6
  Bottom 0.2: v17.6,50.6 18.67,49.53 DIR_1.1
Net_53  (via drill 0.3 pad 0.6)
  Top 0.2: STEP_2.1 30.66,29.02 35.34,29.02 35.71,29.4 35.71,31.9 34.46,33.15 U1_2.16 | U2.2 v20,43.6 | v20,43.6
  Bottom 0.2: v20,43.6 24.2,43.6 28.2,39.6 28.2,31.49 STEP_2.1
Net_54  (via drill 0.3 pad 0.6)
  Top 0.2: DIR_2.1 32.34,28.52 36.21,28.52 36.96,29.27 36.96,32.15 35.96,33.15 U1_2.19 | U2.9 14.8,40 17.6,42.8 v19.4,42.8
  Bottom 0.2: v19.4,42.8 23.6,42.8 27.4,39 27.4,29.75 DIR_2.1
Net_55  (via drill 0.3 pad 0.6)
  Top 0.2: STEP_3.1 30.66,6.17 35.34,6.17 35.71,6.54 35.71,9.04 34.46,10.29 U1_3.16 | U2.10 15.6,34.6 13.8,32.8 10.4,32.8 9.8,32.2 9.8,15 14.8,10 v23.2,10
  Bottom 0.2: v23.2,10 23.2,8.6 25.45,6.35 STEP_3.1
Net_56  (via drill 0.3 pad 0.6)
  Top 0.2: DIR_3.1 32.34,5.67 36.21,5.67 36.96,6.42 36.96,9.29 35.96,10.29 U1_3.19 | U2.11 16.4,34.6 14.2,32.4 10.8,32.4 10.4,32 10.4,15.8 15.4,10.8 v22.4,10.8
  Bottom 0.2: v22.4,10.8 22.4,7.8 26.39,3.81 DIR_3.1
Net_57
  Top 0.2: U3.23 12.68,54.67 11.18,53.17 R11.2
Net_58
  Top 0.2: U3.22 12.57,55.33 11.5,54.25 9.79,54.25 R12.2
Net_59
  Top 0.2: R12.1 D1.2
Net_60
  Top 0.2: R11.1 D2.2
Net_62  (via drill 0.3 pad 0.6)
  Top 1.27: F1.2 8.35,2.75 v9.75,2.75 11.61,2.75 D4.2
  Bottom 0.5: C18.1 v9.75,2.75
Net_63
  Top 1.27: D4.1 16.21,6.59 L1.1
Net_94
  Top 1.27: F1.1 8.26,10.16 J3.2
Net_97
  Top 0.2: R74.2 25.55,29.21 R73.1 25.55,27.19 R72.2
Net_99
  Top 0.2: U6.4 23.05,27.12 R20.2
Net_100  (via drill 0.3 pad 0.6)
  Top 0.2: U6.1 20.77,27.52 v20.25,27
  Bottom 0.2: v20.25,27 20.25,27.5 C23.1
  pour Top (isolate 0.2, no thermals): 11.73,25.67 11.73,24.33 19.47,24.33 19.47,26.05 20.77,27.35 20.77,27.97 16.73,27.97 16.73,25.67
Net_101  (via drill 0.3 pad 0.6)
  Top 0.2: U6.8 20.77,30.48 v20.75,30.5
  Bottom 0.2: v20.75,30.5 C23.2
Net_103
  Top 0.2: R21.2 R22.1 22.95,30.39 U6.5
VMOT  (via drill 0.3 pad 0.6)
  Top 0.2: C7_1.1 41.19,66.73 40.21,65.76 36.21,65.76 C3_1.1 | C7_2.1 41.19,43.88 40.21,42.9 36.21,42.9 C3_2.1 | C7_3.1 41.19,21.02 40.21,20.04 36.21,20.04 C3_3.1 | R72.1 26.35,18.77 C17.1
  Top 0.25: U1_1.22 38.21,57.76 38.73,57.23 v38.73,56.52 | U1_1.28 38.46,60.76 38.71,61.01 v38.71,61.51 | U1_2.22 38.21,34.9 38.73,34.38 v38.73,33.66 | U1_2.28 38.46,37.9 38.71,38.15 v38.71,38.65 | U1_3.22 38.21,12.04 38.73,11.52 v38.73,10.79 | U1_3.28 38.46,15.04 38.71,15.29 v38.71,15.79
  Top 0.6: C1_1.1 v38.73,56.52 | C6_1.1 v38.71,61.51 | C7_1.1 43.13,67.26 VMT_1.1 | C1_2.1 v38.73,33.66 | C6_2.1 v38.71,38.65 | C7_2.1 43.13,44.4 VMT_2.1 | C1_3.1 v38.73,10.79 | C6_3.1 v38.71,15.79 | C7_3.1 43.13,21.54 VMT_3.1
  Top 1: 28.57,24.13 28.57,19.82 26.53,17.78 C17.1 24.62,17.78 21.5,20.9 C19.1 | 28.57,24.13 28.57,46.99 | 28.57,46.99 28.57,68.08 29.5,69 42.75,69 43.18,68.57 VMT_1.1 | VMT_2.1 43.18,46.35 42.55,46.99 28.57,46.99 | VMT_3.1 43.18,23.5 42.55,24.13 28.57,24.13
  Top 2: L1.2 25.66,17.48 C17.1
  Bottom 0.6: VMT_1.1 38.71,62.84 v38.71,61.51 38.73,61.48 v38.73,56.52 | VMT_2.1 38.71,39.98 v38.71,38.65 38.73,38.62 v38.73,33.66 | VMT_3.1 38.71,17.12 v38.71,15.79 38.73,15.77 v38.73,10.79
  pour Top (isolate 0.2, no thermals): 21.23,27.98 21.23,24.12 21.77,24.12 21.77,27.98

## Text on the board
tPlace: R5_1 | C7_1 | J1 | C5_1 | C3_1 | C4_1 | U3 | U1_1 | C6_1 | R1_1 | S1 | C14 | R3_1 | C1_1 | R2_1 | C13 | C10 | C2_1 | R11 | J8 | R12 | R4_1 | R6_1 | R7_1 | R10 | Y1 | D1 | D2 | R9 | R8 | C15 | U2 | R5_2 | C7_2 | C8 | C12 | C5_2 | C3_2 | C16 | C4_2 | C9 | C11 | C21 | D6 | D3 | R13 | U1_2 | C6_2 | R1_2 | U4 | C24 | R21 | R3_2 | C1_2 | R2_2 | C22 | U6 | J2 | R74 | C2_2 | R22 | R73 | R4_2 | R6_2 | R7_2 | L2 | R20 | R72 | D5 | C19 | C17 | R5_3 | C7_3 | J3 | C5_3 | C3_3 | C4_3 | U1_3 | R1_3 | C6_3 | L1 | R3_3 | C1_3 | R2_3 | C2_3 | R4_3 | R6_3 | R7_3 | F1 | D4
bPlace: C23 | C18
tDocu: CNC MAKINESI KONTROL KARTI ATMEGA328P / 3-EKSEN VE 2 AMPER MOTOR AKIMI | A4988